# Altium PCB sd - net 1.5.pcbdoc
Units mil, origin at the board's own origin, x right, y up, seen from the top; angles counter-clockwise.
Board outline 6041.4 x 4421.1 mil, 4 copper layers (Top Layer, Inner1, Inner2, Bottom Layer), stack 62.5 mil thick; 11 components, 13 nets, 51 pads, 12 vias.
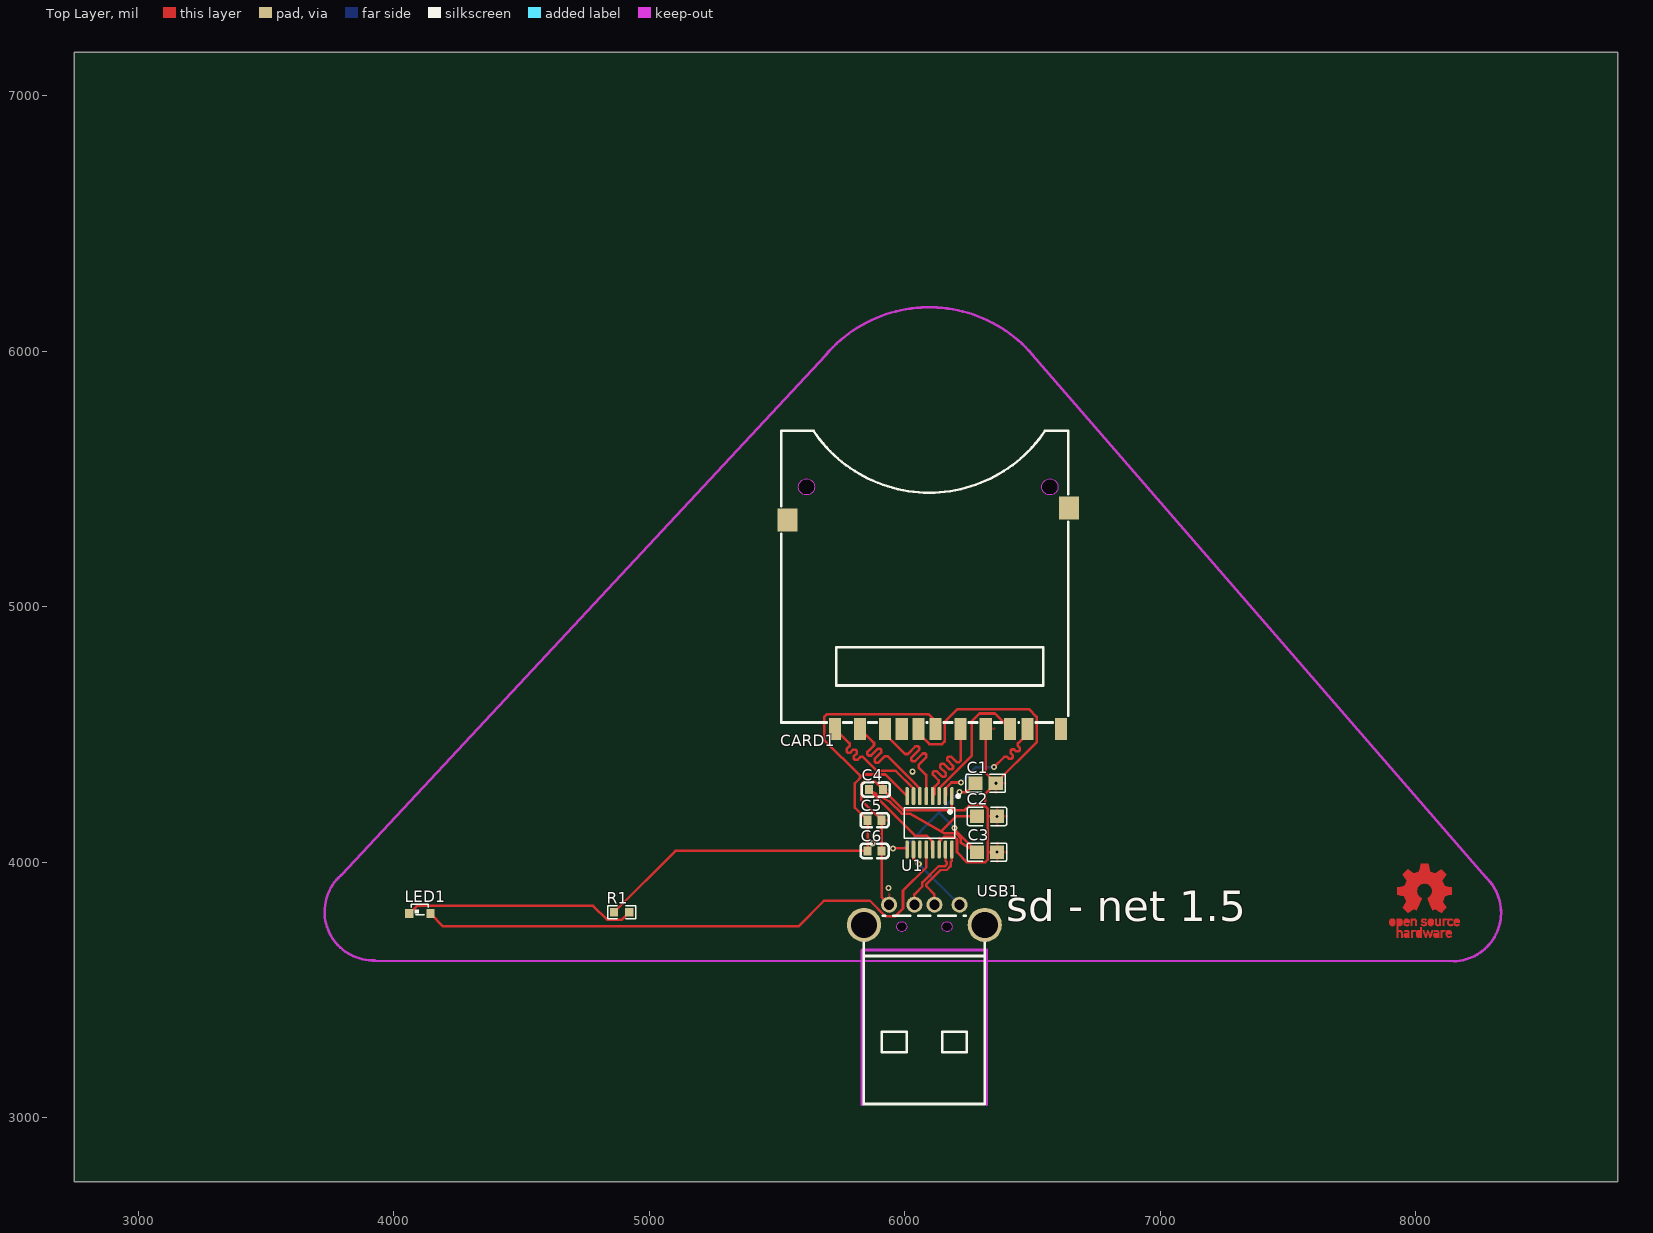
[diagram p0: Top Layer view]
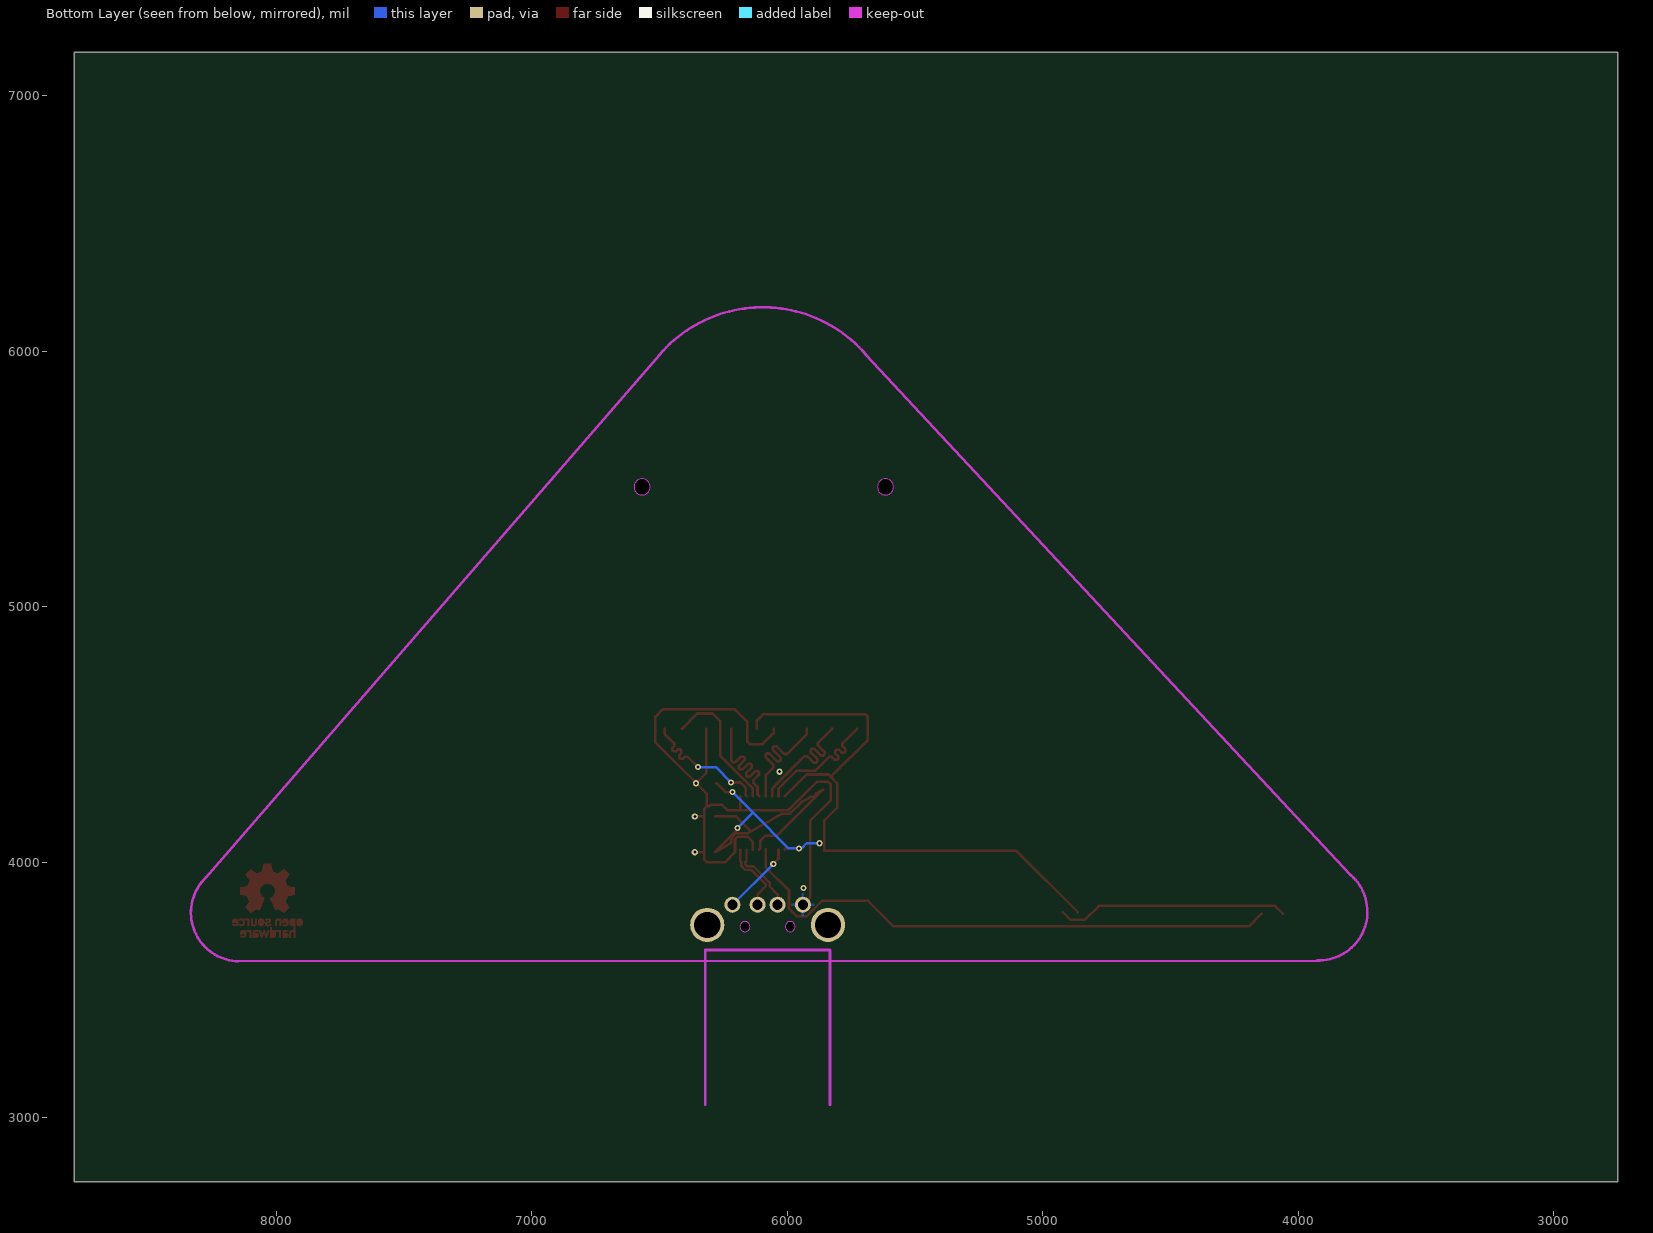
[diagram p1: Bottom Layer view, seen from below]
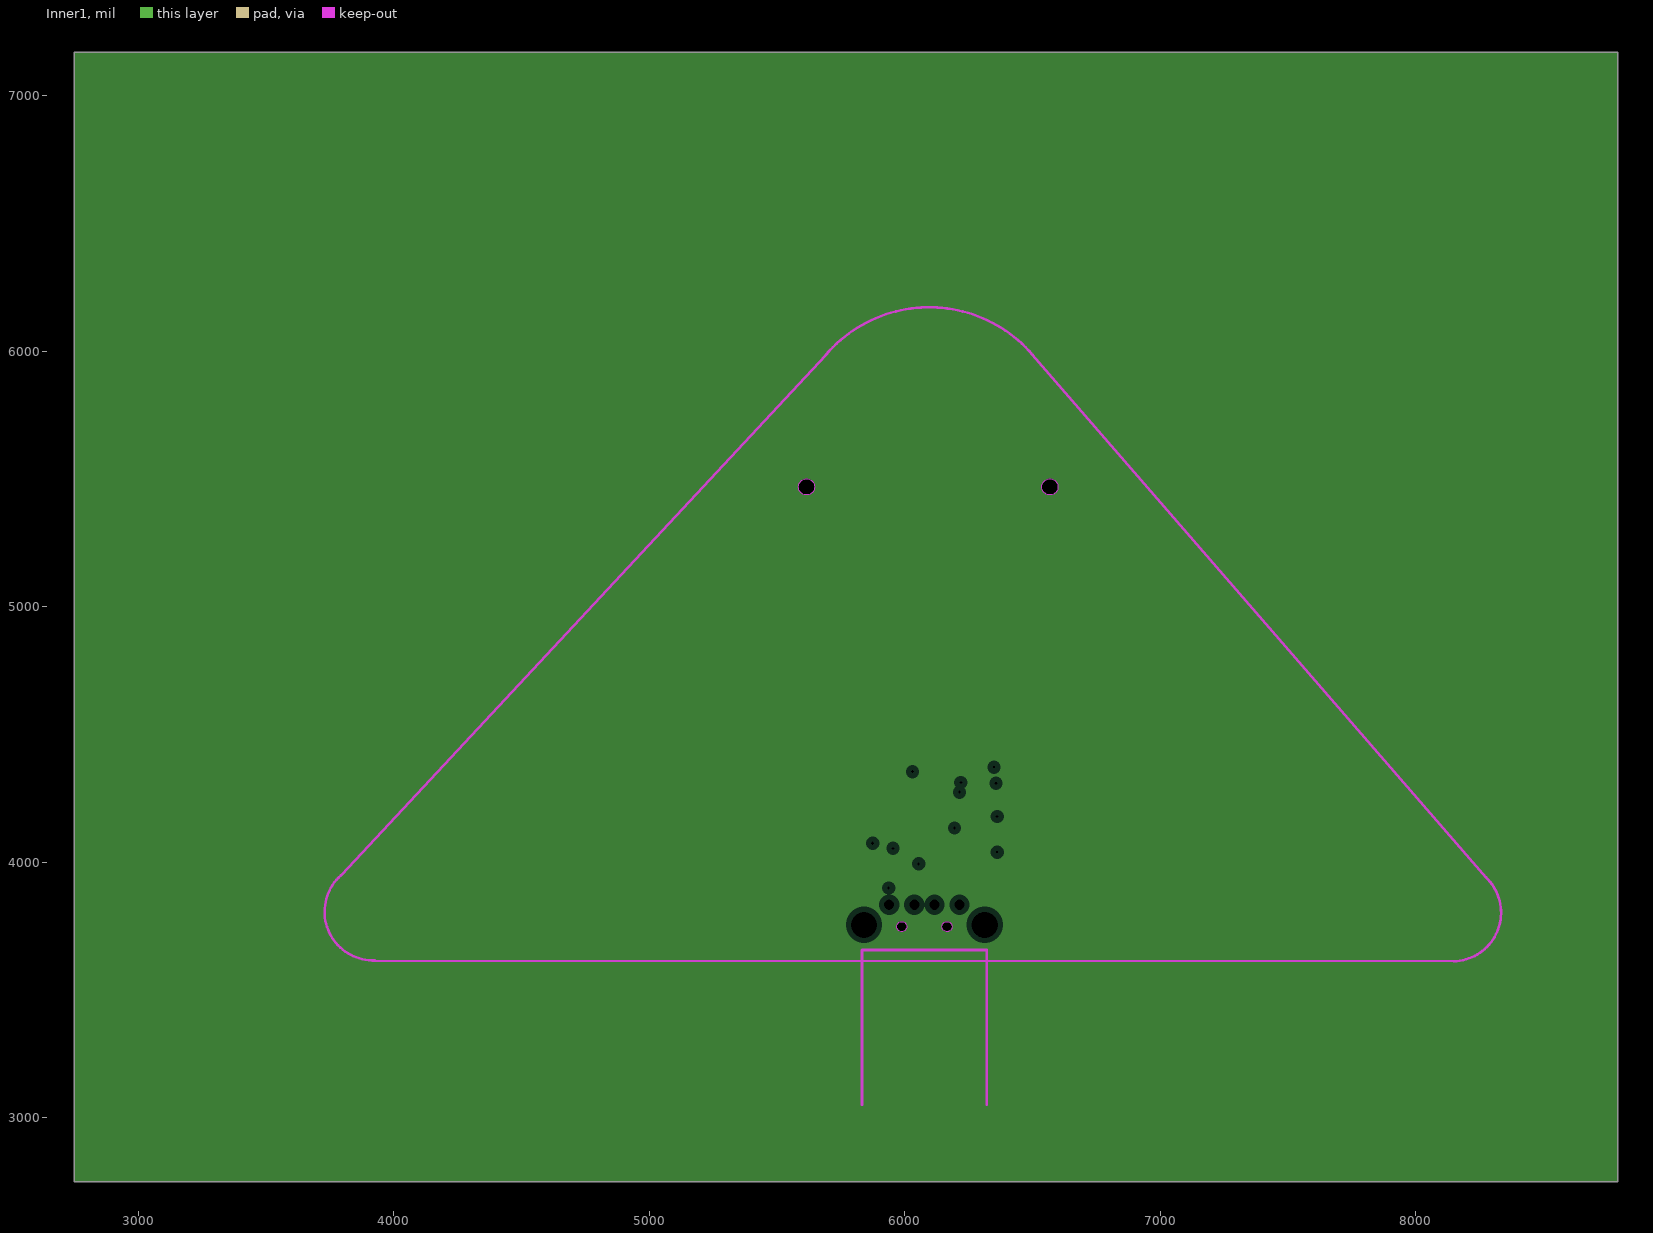
[diagram p2: Inner1, clearances drawn from the general rule]
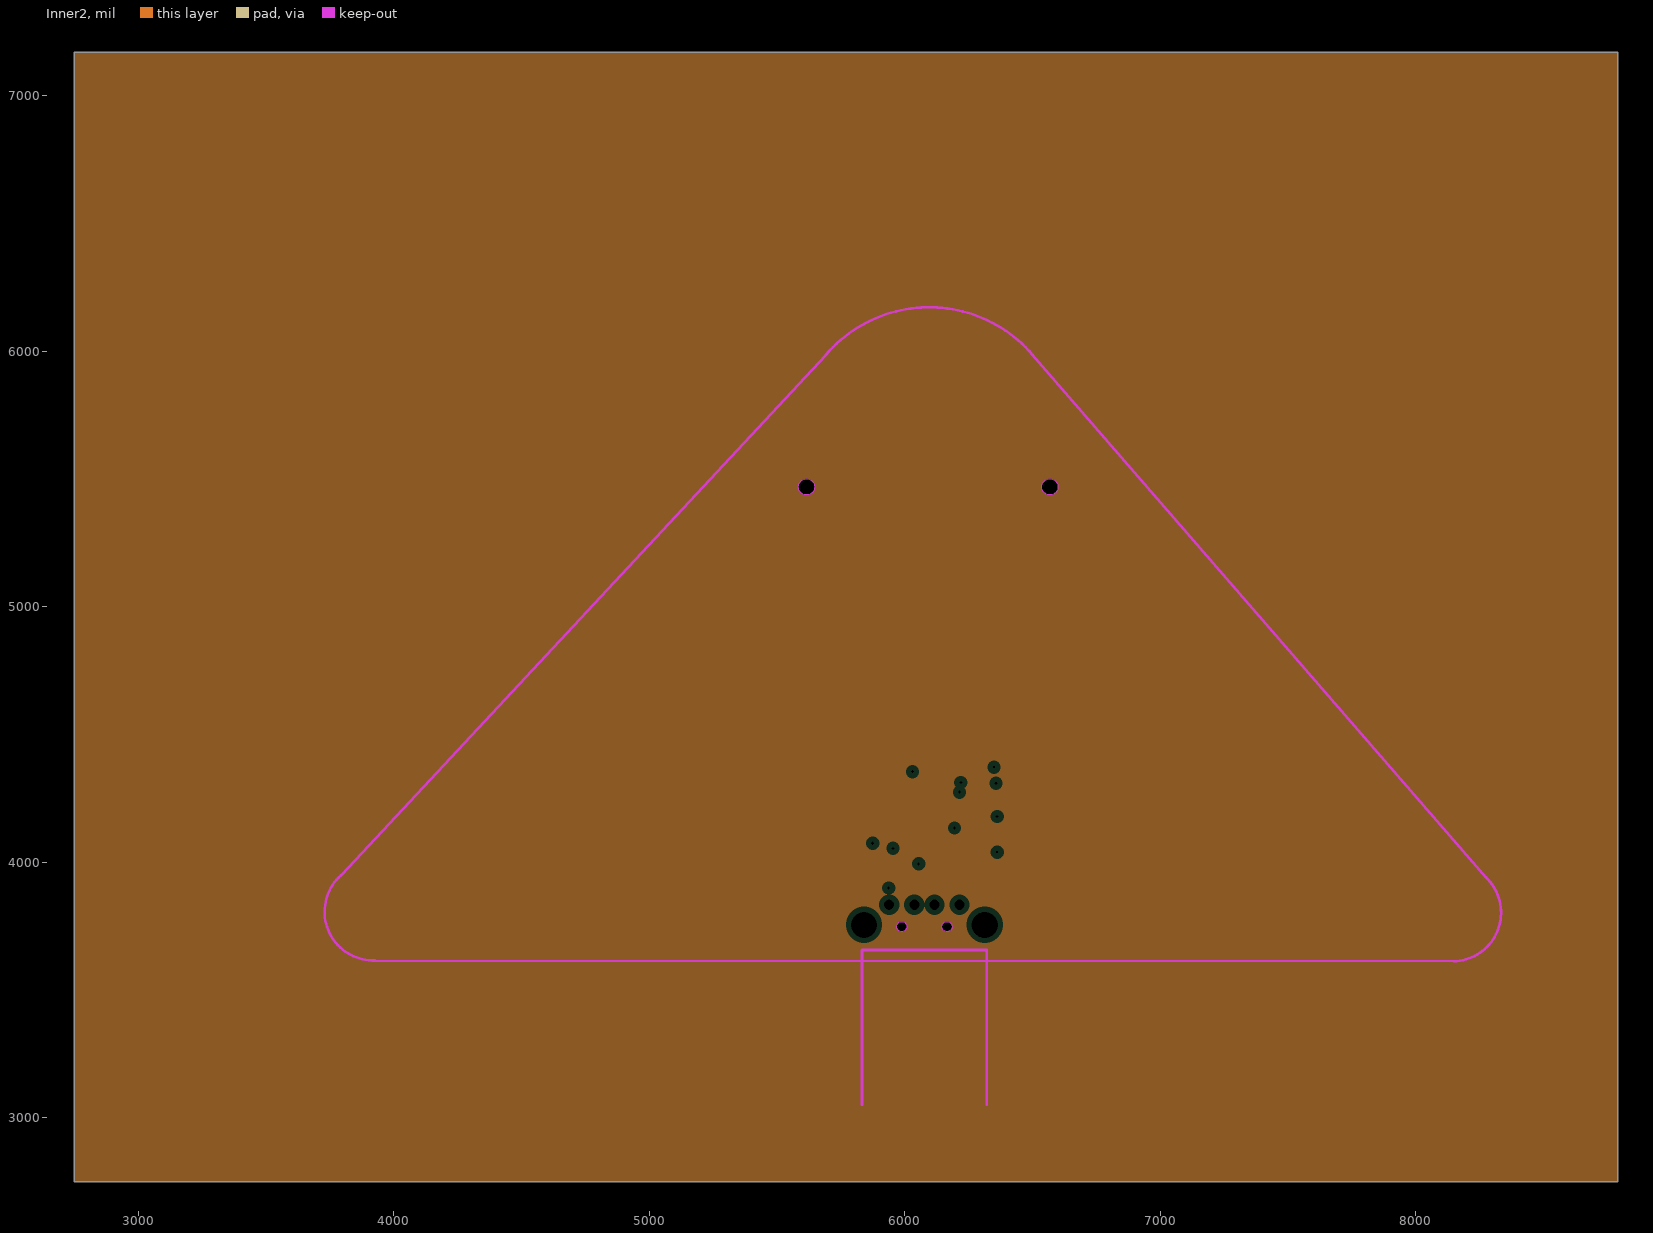
[diagram p3: Inner2, clearances drawn from the general rule]

## Layer stack, top to bottom
Top Layer: signal copper 1.4
Dielectric1: surface 8.3, 7628 RC49% 8.6mil, Dk 0
Inner1: plane copper 0.6
Dielectric2: surface 41.9, 1.1mm H/HOZ Copper, Dk 0
Inner2: plane copper 0.6
Dielectric3: surface 8.3, 7628 RC49% 8.6mil, Dk 0
Bottom Layer: signal copper 1.4

## Board outline
8791.4,2750 2750,2750 2750,7171.1 8791.4,7171.1

## Design rules (kind name [scope] priority, off if disabled: settings)
BoardOutlineClearance copperThickness1oz [All] p0: genericclearance=10 ignorepadtopadclearanceinfootprint=FALSE except(0: Arc-SplitContinuation Track-SplitContinuation SMDPad-SplitContinuation THPad-SplitContinuation Via-SplitContinuation Fill-SplitContinuation Poly-SplitContinuation Region-SplitContinuation Text-SplitContinuation)
BoardOutlineClearance copperThickness2oz [All] p0: genericclearance=10 ignorepadtopadclearanceinfootprint=FALSE except(0: Arc-SplitContinuation Track-SplitContinuation SMDPad-SplitContinuation THPad-SplitContinuation Via-SplitContinuation Fill-SplitContinuation Poly-SplitContinuation Region-SplitContinuation Text-SplitContinuation)
BoardOutlineClearance Plane_innerPlane [All] p0: genericclearance=10 ignorepadtopadclearanceinfootprint=FALSE except(0: Arc-SplitContinuation Track-SplitContinuation SMDPad-SplitContinuation THPad-SplitContinuation Via-SplitContinuation Fill-SplitContinuation Poly-SplitContinuation Region-SplitContinuation Text-SplitContinuation)
BoardOutlineClearance Copper_copperRegion [All] p0: genericclearance=10 ignorepadtopadclearanceinfootprint=FALSE except(0: Arc-SplitContinuation Track-SplitContinuation SMDPad-SplitContinuation THPad-SplitContinuation Via-SplitContinuation Fill-SplitContinuation Poly-SplitContinuation Region-SplitContinuation Text-SplitContinuation)
BoardOutlineClearance otherClearance [All] p0: genericclearance=10 ignorepadtopadclearanceinfootprint=FALSE except(0: Arc-SplitContinuation Track-SplitContinuation SMDPad-SplitContinuation THPad-SplitContinuation Via-SplitContinuation Fill-SplitContinuation Poly-SplitContinuation Region-SplitContinuation Text-SplitContinuation)
Clearance copperThickness1oz [All] p1: gap=7 ignorepadtopadclearanceinfootprint=FALSE
Clearance copperThickness2oz [All] p1: gap=7 ignorepadtopadclearanceinfootprint=FALSE
Clearance Plane_innerPlane [All] p1: gap=7 ignorepadtopadclearanceinfootprint=FALSE
Clearance Copper_copperRegion [All] p1: gap=7 ignorepadtopadclearanceinfootprint=FALSE
Clearance otherClearance [All] p1: gap=7 ignorepadtopadclearanceinfootprint=FALSE
DiffPairsRouting differentialPair [All] p1: maxuncoupledlength=10 minlimit=6 maxlimit=Infinity mostfreqgap=6 toplayer_minwidth=5 toplayer_prefwidth=10 toplayer_maxwidth=100 bottomlayer_minwidth=5 bottomlayer_prefwidth=10 bottomlayer_maxwidth=100
DiffPairsRouting USB_Pair [All] p1: maxuncoupledlength=4.7244 minlimit=5.9055 maxlimit=Infinity mostfreqgap=5.9055 toplayer_minwidth=9.4488 toplayer_prefwidth=9.4488 toplayer_maxwidth=11.811 bottomlayer_minwidth=9.4488 bottomlayer_prefwidth=9.4488 bottomlayer_maxwidth=11.811
PasteMaskExpansion pasteMaskExpansion [All] p1: expansion=0
PlaneConnect innerPlane [All] p1: planeconnectstyle=Relief reliefexpansion=20 reliefentries=4 reliefconductorwidth=10 reliefairgap=10
PolygonConnect copperRegion [All] p1: connectstyle=Relief reliefentries=4 reliefconductorwidth=10 polygonreliefangle="90 Angle" airgapwidth=10
RoutingVias viaSize [All] p1: viastyle="Through Hole" holewidth=12.0078 minholewidth=11.811 maxholewidth=248.0314 width=12.0078 minwidth=11.811 maxwidth=248.0314
SolderMaskExpansion solderMaskExpansion [IsVia] p1: useseparateexpansions=TRUE expansion=-1000 expansionbottom=-1000
SolderMaskExpansion solderMaskExpansion [All] p2: useseparateexpansions=TRUE expansion=2 expansionbottom=2
Width copperThickness1oz [All] p1: maxlimit=100 minlimit=5 preferedwidth=10
Width copperThickness2oz [All] p1: maxlimit=100 minlimit=8 preferedwidth=10

## Components (designator, comment, footprint, x,y, rotation, side; value= is the part's Value field where it differs from the comment)
C1 "10uF" C0805 6317.5,4310 r0 top
C2 "10uF" C0805 6322.5,4180 r0 top
C3 "10uF" C0805 6322.5,4040 r0 top
C4 "100nF" C0603 5887.5,4285 r0 top
C5 "100nF" C0603 5882.5,4165 r0 top
C6 "100nF" C0603 5882.5,4045 r0 top
CARD1 "SD-006M" SD-SMD_SD-006M 6092.5,4955 r180 top
LED1 "12-215SYGC/S530-E2/TR8" LED-SMD_12-215SYGC-S530-E2-TR8 4102.5,3800 r0 top
R1 "220Ω" R0603 4892.5,3805 r0 top
U1 "GL823K-HCY04" SSOP-16_L4.9-W3.9-P0.64-LS6.0-BL 6097.5,4155 r180 top locked
USB1 "AM90" USB-AM-TH_AM90 6077.5,3795 r0 top locked

## Footprints (in the part's own frame and the unit in brackets; to place one, negate y for a bottom-side part, rotate by r counter-clockwise, add the part's x,y. Pads: shape width x height; smd on the part's side, far side on the other; paste and mask are expansions set on the pad)
C0603 [mil]
  rect 31.5x35.4 smd: 1(-27.5,0) 2(27.6,0)
  silkscreen extent -55,-28 55,28
C0805 [mil]
  rect 55.5x53.1 smd paste-3937 mask+2: 1(-39.3,0) 2(39.4,0)
  silkscreen extent -77,-36 77,36
LED-SMD_12-215SYGC-S530-E2-TR8 [mil]
  rect 31.5x35.4 smd: 1(41.4,-0.1) 2(-41.3,0.1)
  silkscreen extent -33,-4 34,35
R0603 [mil]
  rect 31.8x34 smd paste-3937 mask+2: 1(-29.6,0) 2(29.7,0)
  silkscreen extent -54,-26 55,26
SD-SMD_SD-006M [mil]
  rect 47.2x86.6 smd: 1(266.9,432.1) 2(168.5,432.1) 3(38.6,432.1) 4(-28.4,432.1) 5(-126.8,432.1) 6(-225.2,432.1) 7(-320.9,432.1) 8(-387.8,432.1) 9(365.3,432.1) CD(103.5,432.1) WP(-519.7,432.1)
  rect 78.7x90.6 smd: 12(551.1,-384.8) 13(-551.2,-432.1)
  Board Outline Layer lines w0.1: 507.8,-514.8 507.5,-519.7 506.3,-524.5 504.4,-529.1 501.8,-533.3 498.6,-537.1 494.9,-540.3 490.6,-542.9 486.1,-544.7 481.3,-545.9 476.3,-546.3 471.4,-545.9 466.6,-544.7 462,-542.9 457.8,-540.3 454.1,-537.1 450.9,-533.3 448.3,-529.1 446.4,-524.5 445.2,-519.7 444.8,-514.8 445.2,-509.9 446.4,-505.1 448.3,-500.5 450.9,-496.3 454.1,-492.5 457.8,-489.3 462,-486.7 466.6,-484.8 471.4,-483.7 476.3,-483.3 481.3,-483.7 486.1,-484.8 490.6,-486.7 494.9,-489.3 498.6,-492.5 501.8,-496.3 504.4,-500.5 506.3,-505.1 507.5,-509.9 507.8,-514.8 ; -444.9,-514.8 -445.3,-519.7 -446.5,-524.5 -448.4,-529.1 -450.9,-533.3 -454.1,-537.1 -457.9,-540.3 -462.1,-542.9 -466.7,-544.7 -471.5,-545.9 -476.4,-546.3 -481.3,-545.9 -486.1,-544.7 -490.7,-542.9 -494.9,-540.3 -498.7,-537.1 -501.9,-533.3 -504.5,-529.1 -506.4,-524.5 -507.5,-519.7 -507.9,-514.8 -507.5,-509.9 -506.4,-505.1 -504.5,-500.5 -501.9,-496.3 -498.7,-492.5 -494.9,-489.3 -490.7,-486.7 -486.1,-484.8 -481.3,-483.7 -476.4,-483.3 -471.5,-483.7 -466.7,-484.8 -462.1,-486.7 -457.9,-489.3 -454.1,-492.5 -450.9,-496.3 -448.4,-500.5 -446.5,-505.1 -445.3,-509.9 -444.9,-514.8
  Board Outline Layer region: 507.8,-514.8 507.5,-519.7 506.3,-524.5 504.4,-529.1 501.8,-533.3 498.6,-537.1 494.9,-540.3 490.6,-542.9 486.1,-544.7 481.3,-545.9 476.3,-546.3 471.4,-545.9 466.6,-544.7 462,-542.9 457.8,-540.3 454.1,-537.1 450.9,-533.3 448.3,-529.1 446.4,-524.5 445.2,-519.7 444.8,-514.8 445.2,-509.9 446.4,-505.1 448.3,-500.5 450.9,-496.3 454.1,-492.5 457.8,-489.3 462,-486.7 466.6,-484.8 471.4,-483.7 476.3,-483.3 481.3,-483.7 486.1,-484.8 490.6,-486.7 494.9,-489.3 498.6,-492.5 501.8,-496.3 504.4,-500.5 506.3,-505.1 507.5,-509.9
  Board Outline Layer region: 507.8,-514.8 507.5,-519.7 506.3,-524.5 504.4,-529.1 501.8,-533.3 498.6,-537.1 494.9,-540.3 490.6,-542.9 486.1,-544.7 481.3,-545.9 476.3,-546.3 471.4,-545.9 466.6,-544.7 462,-542.9 457.8,-540.3 454.1,-537.1 450.9,-533.3 448.3,-529.1 446.4,-524.5 445.2,-519.7 444.8,-514.8 445.2,-509.9 446.4,-505.1 448.3,-500.5 450.9,-496.3 454.1,-492.5 457.8,-489.3 462,-486.7 466.6,-484.8 471.4,-483.7 476.3,-483.3 481.3,-483.7 486.1,-484.8 490.6,-486.7 494.9,-489.3 498.6,-492.5 501.8,-496.3 504.4,-500.5 506.3,-505.1 507.5,-509.9
  Board Outline Layer region: -444.9,-514.8 -445.3,-519.7 -446.5,-524.5 -448.4,-529.1 -450.9,-533.3 -454.1,-537.1 -457.9,-540.3 -462.1,-542.9 -466.7,-544.7 -471.5,-545.9 -476.4,-546.3 -481.3,-545.9 -486.1,-544.7 -490.7,-542.9 -494.9,-540.3 -498.7,-537.1 -501.9,-533.3 -504.5,-529.1 -506.4,-524.5 -507.5,-519.7 -507.9,-514.8 -507.5,-509.9 -506.4,-505.1 -504.5,-500.5 -501.9,-496.3 -498.7,-492.5 -494.9,-489.3 -490.7,-486.7 -486.1,-484.8 -481.3,-483.7 -476.4,-483.3 -471.5,-483.7 -466.7,-484.8 -462.1,-486.7 -457.9,-489.3 -454.1,-492.5 -450.9,-496.3 -448.4,-500.5 -446.5,-505.1 -445.3,-509.9
  Board Outline Layer region: -444.9,-514.8 -445.3,-519.7 -446.5,-524.5 -448.4,-529.1 -450.9,-533.3 -454.1,-537.1 -457.9,-540.3 -462.1,-542.9 -466.7,-544.7 -471.5,-545.9 -476.4,-546.3 -481.3,-545.9 -486.1,-544.7 -490.7,-542.9 -494.9,-540.3 -498.7,-537.1 -501.9,-533.3 -504.5,-529.1 -506.4,-524.5 -507.5,-519.7 -507.9,-514.8 -507.5,-509.9 -506.4,-505.1 -504.5,-500.5 -501.9,-496.3 -498.7,-492.5 -494.9,-489.3 -490.7,-486.7 -486.1,-484.8 -481.3,-483.7 -476.4,-483.3 -471.5,-483.7 -466.7,-484.8 -462.1,-486.7 -457.9,-489.3 -454.1,-492.5 -450.9,-496.3 -448.4,-500.5 -446.5,-505.1 -445.3,-509.9
  Multi-Layer board cut-out: 507.8,-514.8 507.5,-519.7 506.3,-524.5 504.4,-529.1 501.8,-533.3 498.6,-537.1 494.9,-540.3 490.6,-542.9 486.1,-544.7 481.3,-545.9 476.3,-546.3 471.4,-545.9 466.6,-544.7 462,-542.9 457.8,-540.3 454.1,-537.1 450.9,-533.3 448.3,-529.1 446.4,-524.5 445.2,-519.7 444.8,-514.8 445.2,-509.9 446.4,-505.1 448.3,-500.5 450.9,-496.3 454.1,-492.5 457.8,-489.3 462,-486.7 466.6,-484.8 471.4,-483.7 476.3,-483.3 481.3,-483.7 486.1,-484.8 490.6,-486.7 494.9,-489.3 498.6,-492.5 501.8,-496.3 504.4,-500.5 506.3,-505.1 507.5,-509.9
  Multi-Layer board cut-out: -444.9,-514.8 -445.3,-519.7 -446.5,-524.5 -448.4,-529.1 -450.9,-533.3 -454.1,-537.1 -457.9,-540.3 -462.1,-542.9 -466.7,-544.7 -471.5,-545.9 -476.4,-546.3 -481.3,-545.9 -486.1,-544.7 -490.7,-542.9 -494.9,-540.3 -498.7,-537.1 -501.9,-533.3 -504.5,-529.1 -506.4,-524.5 -507.5,-519.7 -507.9,-514.8 -507.5,-509.9 -506.4,-505.1 -504.5,-500.5 -501.9,-496.3 -498.7,-492.5 -494.9,-489.3 -490.7,-486.7 -486.1,-484.8 -481.3,-483.7 -476.4,-483.3 -471.5,-483.7 -466.7,-484.8 -462.1,-486.7 -457.9,-489.3 -454.1,-492.5 -450.9,-496.3 -448.4,-500.5 -446.5,-505.1 -445.3,-509.9
  silkscreen extent -547,-734 575,408
SSOP-16_L4.9-W3.9-P0.64-LS6.0-BL [mil]
  oval 14x71.4 smd: 1(-87.5,-104.5) 2(-62.5,-104.5) 3(-37.5,-104.5) 4(-12.5,-104.5) 5(12.5,-104.5) 6(37.5,-104.5) 7(62.5,-104.5) 8(87.5,-104.5) 9(87.5,104.5) 10(62.5,104.5) 11(37.5,104.5) 12(12.5,104.5) 13(-12.5,104.5) 14(-37.5,104.5) 15(-62.5,104.5) 16(-87.5,104.5)
  silkscreen extent -118,-110 100,60
USB-AM-TH_AM90 [mil]
  round 63 hole 39.4: 1(137.8,39.4) 2(39.4,39.4) 3(-39.3,39.4) 4(-137.8,39.4)
  round 133.9 hole 102.4: MH1(236.3,-39.4) MH2(-236.2,-39.4)
  Board Outline Layer lines w0.1: -108.2,-46.3 -107.9,-50.1 -106.7,-53.8 -104.9,-57.2 -102.5,-60.2 -99.5,-62.6 -96.1,-64.4 -92.4,-65.6 -88.6,-65.9 -84.7,-65.6 -81,-64.4 -77.6,-62.6 -74.6,-60.2 -72.2,-57.2 -70.4,-53.8 -69.2,-50.1 -68.9,-46.3 -69.2,-42.4 -70.4,-38.7 -72.2,-35.3 -74.6,-32.3 -77.6,-29.9 -81,-28.1 -84.7,-27 -88.6,-26.6 -92.4,-27 -96.1,-28.1 -99.5,-29.9 -102.5,-32.3 -104.9,-35.3 -106.7,-38.7 -107.9,-42.4 -108.2,-46.3 ; 68.9,-46.3 69.3,-50.1 70.4,-53.8 72.2,-57.2 74.7,-60.2 77.7,-62.6 81.1,-64.4 84.8,-65.6 88.6,-65.9 92.5,-65.6 96.2,-64.4 99.6,-62.6 102.5,-60.2 105,-57.2 106.8,-53.8 107.9,-50.1 108.3,-46.3 107.9,-42.4 106.8,-38.7 105,-35.3 102.5,-32.3 99.6,-29.9 96.2,-28.1 92.5,-27 88.6,-26.6 84.8,-27 81.1,-28.1 77.7,-29.9 74.7,-32.3 72.2,-35.3 70.4,-38.7 69.3,-42.4 68.9,-46.3
  Board Outline Layer lines w10: -244.1,-744.1 -244.1,-137.8 244.1,-137.8 244.1,-744.1
  Board Outline Layer region: 108.3,-46.3 107.9,-50.1 106.8,-53.8 105,-57.2 102.5,-60.2 99.6,-62.6 96.2,-64.4 92.5,-65.6 88.6,-65.9 84.8,-65.6 81.1,-64.4 77.7,-62.6 74.7,-60.2 72.2,-57.2 70.4,-53.8 69.3,-50.1 68.9,-46.3 69.3,-42.4 70.4,-38.7 72.2,-35.3 74.7,-32.3 77.7,-29.9 81.1,-28.1 84.8,-27 88.6,-26.6 92.5,-27 96.2,-28.1 99.6,-29.9 102.5,-32.3 105,-35.3 106.8,-38.7 107.9,-42.4
  Board Outline Layer region: 108.3,-46.3 107.9,-50.1 106.8,-53.8 105,-57.2 102.5,-60.2 99.6,-62.6 96.2,-64.4 92.5,-65.6 88.6,-65.9 84.8,-65.6 81.1,-64.4 77.7,-62.6 74.7,-60.2 72.2,-57.2 70.4,-53.8 69.3,-50.1 68.9,-46.3 69.3,-42.4 70.4,-38.7 72.2,-35.3 74.7,-32.3 77.7,-29.9 81.1,-28.1 84.8,-27 88.6,-26.6 92.5,-27 96.2,-28.1 99.6,-29.9 102.5,-32.3 105,-35.3 106.8,-38.7 107.9,-42.4
  Board Outline Layer region: -68.9,-46.3 -69.2,-50.1 -70.4,-53.8 -72.2,-57.2 -74.6,-60.2 -77.6,-62.6 -81,-64.4 -84.7,-65.6 -88.6,-65.9 -92.4,-65.6 -96.1,-64.4 -99.5,-62.6 -102.5,-60.2 -104.9,-57.2 -106.7,-53.8 -107.9,-50.1 -108.2,-46.3 -107.9,-42.4 -106.7,-38.7 -104.9,-35.3 -102.5,-32.3 -99.5,-29.9 -96.1,-28.1 -92.4,-27 -88.6,-26.6 -84.7,-27 -81,-28.1 -77.6,-29.9 -74.6,-32.3 -72.2,-35.3 -70.4,-38.7 -69.2,-42.4
  Board Outline Layer region: -68.9,-46.3 -69.2,-50.1 -70.4,-53.8 -72.2,-57.2 -74.6,-60.2 -77.6,-62.6 -81,-64.4 -84.7,-65.6 -88.6,-65.9 -92.4,-65.6 -96.1,-64.4 -99.5,-62.6 -102.5,-60.2 -104.9,-57.2 -106.7,-53.8 -107.9,-50.1 -108.2,-46.3 -107.9,-42.4 -106.7,-38.7 -104.9,-35.3 -102.5,-32.3 -99.5,-29.9 -96.1,-28.1 -92.4,-27 -88.6,-26.6 -84.7,-27 -81,-28.1 -77.6,-29.9 -74.6,-32.3 -72.2,-35.3 -70.4,-38.7 -69.2,-42.4
  Multi-Layer board cut-out: 108.3,-46.3 107.9,-50.1 106.8,-53.8 105,-57.2 102.5,-60.2 99.6,-62.6 96.2,-64.4 92.5,-65.6 88.6,-65.9 84.8,-65.6 81.1,-64.4 77.7,-62.6 74.7,-60.2 72.2,-57.2 70.4,-53.8 69.3,-50.1 68.9,-46.3 69.3,-42.4 70.4,-38.7 72.2,-35.3 74.7,-32.3 77.7,-29.9 81.1,-28.1 84.8,-27 88.6,-26.6 92.5,-27 96.2,-28.1 99.6,-29.9 102.5,-32.3 105,-35.3 106.8,-38.7 107.9,-42.4
  Multi-Layer board cut-out: -68.9,-46.3 -69.2,-50.1 -70.4,-53.8 -72.2,-57.2 -74.6,-60.2 -77.6,-62.6 -81,-64.4 -84.7,-65.6 -88.6,-65.9 -92.4,-65.6 -96.1,-64.4 -99.5,-62.6 -102.5,-60.2 -104.9,-57.2 -106.7,-53.8 -107.9,-50.1 -108.2,-46.3 -107.9,-42.4 -106.7,-38.7 -104.9,-35.3 -102.5,-32.3 -99.5,-29.9 -96.1,-28.1 -92.4,-27 -88.6,-26.6 -84.7,-27 -81,-28.1 -77.6,-29.9 -74.6,-32.3 -72.2,-35.3 -70.4,-38.7 -69.2,-42.4
  silkscreen extent -236,-741 236,-4

## Via types
v1: diameter 24, hole 12, Top Layer to Bottom Layer, 12 vias

## Nets (pads, with @x,y where several pads share a name; then routed paths per layer and width w, separated by ;. In a path a pad name is that pad's centre, name@x,y a point inside that pad or via, vN(x,y) a via of type N, cw(c..) or ccw(c..) an arc to the next point about the centre after c; other vN are vias at no path point)
$1N2347: U1.10 USB1.1 | length 290.8
  Top Layer w10: U1.10 6035,4014.7 v1(6055.3,3994.4)
  Bottom Layer w10: v1(6055.3,3994.4) USB1.1
$1N2351: C1.1 C2.1 C3.1 C4.1 C5.1 C6.1 CARD1.4 R1.1 U1.8 U1.9 U1.13 | length 4267.7
  Top Layer w10: R1.1 5102.9,4045 C6.1 5855,4075 ; v1(5875,4075) 5855,4075 ; 5888.3,4267.3 ccw(c5899.3,4267.3) 5899.3,4256.3 5909.6,4256.3 5943.8,4236.5 5989.3,4191 6022.4,4191 6142.2,4121.6 ; 5888.4,4267.3 5888.4,4268.6 C4.1 6040,4105 6085.5,4105 6105.5,4085 6105.5,4055 U1.13 ; v1(5955,4055) 6005.5,4055 U1.9 ; U1.8 5925.4,4344.2 5839.6,4344.2 5835,4339.5 ; CARD1.4 6120.9,4553.6 6095,4579.5 5695,4579.5 5685,4569.5 5685,4479.5 5825,4339.5 5835,4339.5 ; v1(6195,4135) 6195,4128.2 C3.1 6219.1,4077.1 6219.1,4096.3 6200.9,4114.6 6154.4,4114.6 6142.2,4121.6 ; v1(6215,4275) 6243.2,4275 C1.1 ; C2.1 6200.5,4180 6142.2,4121.6 ; 5835,4339.5 5805,4309.5 5805,4215 C5.1 5855,4075
  Bottom Layer w10: v1(5875,4075) 5925,4075 5945,4055 v1(5955,4055) 5995,4055 6135,4195 ; v1(6195,4135) 6135,4195 ; v1(6215,4275) 6135,4195
$1N2352: LED1.2 R1.2 | length 908.7
  Top Layer w10: LED1.2 4091.2,3830.1 4781.2,3830.1 4836.3,3775 4892.2,3775 R1.2
$1N2353: LED1.1 U1.12 | length 2217.7
  Top Layer w10: LED1.1 4193.9,3749.9 5583.9,3749.9 5683.9,3849.9 5863.9,3849.9 5923.9,3789.9 5963.9,3789.9 5993.9,3819.9 5993.9,3889.9 6085,3981.1 U1.12
$1N2355: CARD1.2 U1.5 | length 524.9
  Top Layer w10: CARD1.2 5924,4502.9 6002.5,4424.4 6012.5,4424.4 6042.8,4454.7 6052.8,4454.7 6056.9,4450.6 6056.9,4440.6 6026.6,4410.3 6026.6,4400.3 6030.8,4396.1 6040.8,4396.1 6071.1,4426.4 6081.1,4426.4 6085.2,4422.3 6085.2,4412.3 6054.9,4382 6054.9,4372 6084,4342.9 6084,4260.5 U1.5
$1N2356: CARD1.1 U1.6 | length 528.1
  Top Layer w10: CARD1.1 5880.2,4468.3 5880.2,4458.3 5854.7,4432.8 5854.7,4422.8 5858.9,4418.6 5868.9,4418.6 5894.4,4444.1 5904.4,4444.1 5908.5,4440 5908.5,4430 5883,4404.5 5883,4394.5 5887.2,4390.4 5897.2,4390.4 5922.6,4415.8 5932.6,4415.8 6042.2,4306.2 6042.5,4306.2 6053,4295.7 6053,4295.5 6060,4288.4 U1.6
$1N2358: CARD1.5 U1.4 | length 529.7
  Top Layer w10: U1.4 6117.1,4266.5 6117.1,4295.7 6133,4311.7 6133,4321.7 6111.1,4343.6 6111.1,4353.6 6115.3,4357.7 6125.3,4357.7 6147.2,4335.8 6157.2,4335.8 6161.3,4339.9 6161.3,4349.9 6139.4,4371.9 6139.4,4381.9 6143.5,4386 6153.5,4386 6175.4,4364.1 6185.4,4364.1 6189.6,4368.2 6189.6,4378.2 6167.7,4400.1 6167.7,4410.1 6171.8,4414.3 6181.8,4414.3 6203.7,4392.4 6213.7,4392.4 6219.3,4397.9 CARD1.5
$1N2360: CARD1.7 U1.3 | length 533.9
  Top Layer w10: U1.3 6135,4289.5 6263.4,4417.8 6263.4,4552.9 6293.4,4582.9 6353.4,4582.9 CARD1.7
$1N2361: CARD1.8 U1.2 | length 525.1
  Top Layer w10: U1.2 6163.4,4262.9 6163.4,4292.9 6183.4,4312.9 v1(6220.3,4312.9) ; v1(6350.3,4372.9) 6391,4413.6 6401,4413.6 6408.5,4406 6418.5,4406 6422.7,4410.1 6422.7,4420.1 6415.1,4427.7 6415.1,4437.7 6419.3,4441.9 6429.3,4441.9 6436.8,4434.3 6446.8,4434.3 6451,4438.4 6451,4448.4 6443.4,4456 6443.4,4466 6480.3,4502.9 CARD1.8
  Bottom Layer w10: v1(6220.3,4312.9) 6280.3,4372.9 v1(6350.3,4372.9)
$1N2362: CARD1.9 U1.7 | length 521.3
  Top Layer w10: CARD1.9 5784.6,4465.5 5784.6,4455.5 5773.3,4444.2 5773.3,4434.2 5777.5,4430.1 5787.5,4430.1 5798.8,4441.4 5808.8,4441.4 5812.9,4437.2 5812.9,4427.2 5801.6,4415.9 5801.6,4405.9 5805.7,4401.8 5815.7,4401.8 5827,4413.1 5837,4413.1 5892,4358.2 5965.5,4358.2 6035,4288.7 U1.7
$1N3940: U1.15 USB1.3 | length 285.1
  Top Layer w9.4: USB1.3 6038.2,3874.8 6069.9,3906.5 6069.9,3921.8 6133.8,3985.8 6158.5,3985.8 6164.9,3992.1 6164.9,4001 6160,4005.8 U1.15
$1N3946: U1.16 USB1.2 | length 285
  Top Layer w9.4: USB1.2 6116.9,3874.8 6085.2,3906.5 6085.2,3915.4 6140.2,3970.4 6164.9,3970.4 6180.2,3985.7 6180.2,4001 6185,4005.8 U1.16
GND: C1.2 C2.2 C3.2 C4.2 C5.2 C6.2 CARD1.3 CARD1.6 U1.1 U1.14 USB1.4 | length 2981.7
  Top Layer w10: USB1.4 5910.1,3864 C6.2 C5.2 5830.1,4245 5830.1,4305 5840.1,4315 5885.1,4315 C4.2 5995.1,4205 6185.1,4205 ; CARD1.3 6053.9,4505.9 6096.9,4462.9 6146.9,4462.9 6156.9,4472.9 6156.9,4550 6206.9,4600 6486.9,4600 6516.9,4570 6516.9,4470 C1.2 ; U1.14 6135.1,4080.5 6155.1,4100.5 6195.1,4100.5 6205.1,4090.5 6205.1,4040.5 6245.1,4000.5 6315.1,4000.5 6325.1,4010.5 6325.1,4040.5 ; U1.1@6185.1,4259.5 6185.1,4205 ; CARD1.6 6317.7,4349.2 C1.2 ; C2.2@6362.1,4180.5 6325.1,4180.5 ; v1(6362.5,4040) 6325.6,4040 6325.1,4040.5 ; 6185.1,4205 6235.1,4205 6255.1,4225 6300.6,4225 6305.1,4220.5 6315.1,4220.5 ; 6315.1,4220.5 6325.1,4210.5 6325.1,4180.5 ; 6315.1,4220.5 6315.1,4268.2 C1.2 ; 6325.1,4040.5 6325.1,4180.5
  other v1: 5937.5,3900 6362.5,4180 6357.5,4310 6031,4355.1
pads on no net: CARD1.12 CARD1.13 CARD1.CD CARD1.WP U1.11 USB1.MH1 USB1.MH2

## Polygon pours and split planes (outlines as drawn)
GND on Top Layer (solid, remove dead copper, pour order 0): 3662.5,6255 3662.5,3015 8377.5,3015 8377.5,6255
GND on Bottom Layer (solid, remove dead copper, pour order 2): 3672.5,6240 3672.5,3000 8382.5,3000 8382.5,6240

## Keep-outs
Board Outline Layer:
  lines w10: 3793.4,3949.4 3784.5,3940.9 3776.2,3931.9 3768.5,3922.3 3761.4,3912.3 3755,3901.9 3749.3,3891.1 3744.3,3879.9 3740,3868.4 3736.4,3856.7 3733.6,3844.7 3731.6,3832.6 3730.3,3820.5 3729.9,3808.2 3730.2,3796 3731.3,3783.7 3733.2,3771.6 3735.9,3759.7 3739.3,3747.9 3743.5,3736.4 3748.4,3725.2 3754.1,3714.3 3760.4,3703.8 3767.3,3693.7 3774.9,3684.1 3783.2,3675 3791.9,3666.4 3801.2,3658.4 3811,3651.1 3821.3,3644.3 3832,3638.3 3843,3633 3854.3,3628.3 3866,3624.4 3877.8,3621.3 3889.8,3618.9 3902,3617.3 3914.2,3616.5 3926.5,3616.5 ; 3796.5,3951.5 5691.5,5986.5 5705.1,6001.8 5719.2,6016.5 5734,6030.7 5749.2,6044.3 5765,6057.3 5781.2,6069.7 5797.9,6081.5 5815.1,6092.6 5832.7,6103 5850.6,6112.8 5868.9,6121.9 5887.6,6130.3 5906.5,6137.9 5925.8,6144.8 5945.3,6151 5965,6156.4 5984.9,6161.1 6004.9,6165 6025.1,6168.1 6045.5,6170.4 6065.8,6172 6086.3,6172.8 6106.7,6172.8 6127.1,6172 6147.5,6170.4 6167.8,6168.1 6188,6165 6208.1,6161.1 6228,6156.4 6247.7,6151 6267.2,6144.8 6286.4,6137.9 6305.4,6130.3 6324,6121.9 6342.3,6112.8 6360.3,6103 6377.9,6092.6 6395,6081.5 6411.7,6069.7 6428,6057.3 6443.7,6044.3 6459,6030.7 6473.7,6016.5 6487.9,6001.8 6501.5,5986.5 8275.9,3941.4 8284.3,3932.7 8292.2,3923.6 8299.5,3913.9 8306.2,3903.8 8312.3,3893.3 8317.6,3882.5 8322.3,3871.3 8326.2,3859.9 8329.4,3848.2 8331.9,3836.3 8333.6,3824.3 8334.5,3812.3 8334.7,3800.2 8334.1,3788.1 8332.7,3776.1 8330.6,3764.1 8327.7,3752.4 8324.1,3740.8 8319.8,3729.5 8314.7,3718.5 8309,3707.9 8302.6,3697.6 8295.5,3687.7 8287.9,3678.4 8279.7,3669.5 8270.9,3661.1 8261.6,3653.4 8251.9,3646.2 8241.7,3639.7 8231.1,3633.8 8220.1,3628.6 8208.9,3624.2 8197.4,3620.4 8185.7,3617.4 8173.8,3615.1 8161.8,3613.6 8149.7,3612.8 ; 3915.7,3615.9 8155.7,3612.9

## Other copper
Top Layer:
  region: 8134.3,3705.9 8132.8,3705.6 8130.3,3705.7 8127.9,3705.8 8126.9,3706 8125.9,3706.3 8124.6,3706.9 8123.2,3707.6 8121.9,3708.9 8120.6,3710.2 8119.9,3711.5 8119.3,3712.8 8118.9,3714 8118.6,3715.2 8118.4,3716.6 8118.1,3718.1 8118.1,3720.1 8118.1,3722.2 8118.3,3723.4 8118.5,3724.7 8118.9,3726.2 8119.3,3727.7 8119.7,3728.7 8120.2,3729.7 8121.1,3730.8 8121.9,3731.9 8122.9,3732.7 8123.8,3733.5 8124.8,3733.9 8125.8,3734.4 8127,3734.7 8128.2,3735 8130,3735 8131.8,3735 8132.9,3734.8 8134,3734.5 8135.5,3733.8 8137,3733.1 8138.5,3731.6 8139.9,3730.1 8140.5,3728.9 8141.1,3727.7 8141.5,3726.6 8141.8,3725.5 8141.9,3721.7 8142,3718 8133,3718 8124.1,3718 8124.1,3717.5 8124.1,3717 8124.3,3716 8124.6,3715.1 8125,3714.3 8125.4,3713.5 8126.1,3712.8 8126.8,3712.2 8127.7,3711.8 8128.5,3711.4 8129.6,3711.3 8130.7,3711.1 8131.8,3711.2 8132.9,3711.4 8133.6,3711.7 8134.3,3711.9 8135.1,3712.4 8135.9,3712.9 8136.5,3713.4 8137.2,3713.9 8139.3,3712.1 8141.5,3710.3 8140.8,3709.5 8140.1,3708.8 8139.1,3708.1 8138.1,3707.4 8136.9,3706.9 8135.8,3706.3 hole: 81240702.8,37234403.8 81240702.8,37229917.7 81240702.8,37229917.7 81300215.4,37229917.7 81300215.4,37229917.7 81359726.3,37229917.7 81359726.3,37229917.7 81359726.3,37234403.8 81359726.3,37234403.8 81359726.3,37238888.1 81359726.3,37238888.1 81357322.1,37248116.9 81357322.1,37248116.9 81354917.8,37257345.6 81354917.8,37257345.6 81351578.2,37263886.4 81351578.2,37263886.4 81348238.6,37270428.8 81348238.6,37270428.8 81341582.8,37277646.1 81341582.8,37277646.1 81334925.3,37284865.2 81334925.3,37284865.2 81326818.8,37289051.2 81326818.8,37289051.2 81318712.4,37293239 81318712.4,37293239 81302628,37293782.3 81302628,37293782.3 81286543.6,37294325.5 81286543.6,37294325.5 81277460.1,37290502.7 81277460.1,37290502.7 81268376.7,37286678.2 81268376.7,37286678.2 81264306.8,37283478.7 81264306.8,37283478.7 81260238.6,37280279.1 81260238.6,37280279.1 81256320.4,37275596.4 81256320.4,37275596.4 81252400.6,37270912.1 81252400.6,37270912.1 81248956,37264128 81248956,37264128 81245511.3,37257345.6 81245511.3,37257345.6 81243107.1,37248116.9 81243107.1,37248116.9 81240702.8,37238888.1 81240702.8,37238888.1 81240702.8,37234403.8
  region: 8010.3,3705.6 8009.2,3705.9 8008.2,3706.1 8007.3,3706.6 8006.4,3707 8005.5,3707.8 8004.6,3708.5 8003.8,3709.7 8003,3710.9 8002.7,3711.7 8002.5,3712.5 8002.3,3713.7 8002.1,3715 8002.1,3720.4 8002.1,3725.8 8002.4,3727.3 8002.6,3728.9 8003.1,3729.9 8003.6,3730.9 8005,3732.2 8006.3,3733.6 8007.3,3734.1 8008.3,3734.6 8009.4,3734.8 8010.4,3735.1 8012.2,3735 8014,3734.9 8015,3734.5 8016,3734.1 8016.9,3733.6 8017.8,3733 8018.5,3732.4 8019.2,3731.8 8019.2,3739.1 8019.2,3746.3 8022.2,3746.3 8025.2,3746.3 8025.2,3726.1 8025.2,3706 8022.2,3706 8019.2,3706 8019.2,3707.3 8019.2,3708.7 8018.6,3708.2 8018,3707.6 8017,3707 8016,3706.4 8015.1,3706.1 8014.1,3705.7 8012.2,3705.7 hole: 80134991.5,37115395.1 80147956.4,37115315.2 80147956.4,37115315.2 80156654.7,37118203.1 80156654.7,37118203.1 80165353,37121091 80165353,37121091 80173512.8,37129286.6 80173512.8,37129286.6 80181672.5,37137480.4 80181672.5,37137480.4 80185270.6,37148503.9 80185270.6,37148503.9 80188870.3,37159527.4 80188870.3,37159527.4 80190629.3,37176636.7 80190629.3,37176636.7 80192388.3,37193746 80192388.3,37193746 80191431.2,37215573 80191431.2,37215573 80190472.5,37237400 80190472.5,37237400 80188651.9,37246117.2 80188651.9,37246117.2 80186832.8,37254836 80186832.8,37254836 80182152.7,37264759.6 80182152.7,37264759.6 80177472.6,37274684.9 80177472.6,37274684.9 80172455.7,37278904.3 80172455.7,37278904.3 80167438.8,37283123.7 80167438.8,37283123.7 80160818,37286576.6 80160818,37286576.6 80154197.1,37290029.4 80154197.1,37290029.4 80138112.7,37290492.7 80138112.7,37290492.7 80122028.2,37290957.6 80122028.2,37290957.6 80114643.8,37288596.3 80114643.8,37288596.3 80107261,37286236.6 80107261,37286236.6 80099699.8,37279584.2 80099699.8,37279584.2 80092138.6,37272931.8 80092138.6,37272931.8 80089110.7,37267002.6 80089110.7,37267002.6 80086084.6,37261073.4 80086084.6,37261073.4 80083195.2,37250719.9 80083195.2,37250719.9 80080305.7,37240367.9 80080305.7,37240367.9 80080305.7,37203393 80080305.7,37203393 80080305.7,37166416.5 80080305.7,37166416.5 80083195.2,37156064.5 80083195.2,37156064.5 80086084.6,37145711 80086084.6,37145711 80089165.8,37139676.8 80089165.8,37139676.8 80092245.3,37133642.6 80092245.3,37133642.6 80098095.8,37127963.4 80098095.8,37127963.4 80103946.4,37122284.2 80103946.4,37122284.2 80112988.1,37118879.7 80112988.1,37118879.7 80122028.2,37115475.1 80122028.2,37115475.1 80134991.5,37115395.1
  region: 7961.2,3705.6 7959.9,3705.9 7958.7,3706.3 7957.4,3706.9 7956.1,3707.6 7955.3,3708.6 7954.4,3709.6 7954,3710.4 7953.6,3711.2 7953.3,3712.1 7953.1,3713.1 7953.1,3714.4 7953.1,3715.8 7953.3,3716.8 7953.6,3717.7 7954,3718.5 7954.4,3719.3 7955.3,3720.2 7956.2,3721.2 7957.5,3721.9 7958.8,3722.5 7960.1,3722.8 7961.3,3723 7965.9,3723 7970.5,3723 7970.4,3724.9 7970.4,3726.8 7970.1,3727.3 7969.9,3727.9 7969.4,3728.4 7968.9,3728.8 7967.9,3729.1 7966.9,3729.4 7964.8,3729.4 7962.8,3729.4 7962,3729.3 7961.3,3729.1 7960.9,3728.9 7960.6,3728.7 7959.8,3728 7959.1,3727.3 7956.8,3729 7954.5,3730.7 7954.5,3730.9 7954.5,3731.1 7955.6,3732.1 7956.7,3733.2 7957.7,3733.7 7958.6,3734.2 7959.6,3734.5 7960.5,3734.8 7961.3,3734.9 7962,3735 7965,3735 7968,3734.9 7969.3,3734.6 7970.7,3734.2 7971.7,3733.7 7972.8,3733.2 7973.9,3732.2 7974.9,3731.2 7975.3,3730.3 7975.8,3729.3 7976,3728.4 7976.3,3727.4 7976.3,3716.7 7976.3,3706 7973.4,3706 7970.5,3706 7970.5,3707.2 7970.5,3708.4 7969.8,3707.6 7969.1,3706.9 7968.4,3706.5 7967.6,3706.1 7966.6,3705.9 7965.7,3705.6 7963.4,3705.6 hole: 79614954.1,37114830.2 79625019.6,37111759 79625019.6,37111759 79646732.8,37111894 79646732.8,37111894 79668447.7,37112028.9 79668447.7,37112028.9 79677687.9,37114750.2 79677687.9,37114750.2 79686929.8,37117471.5 79686929.8,37117471.5 79692548.6,37122402.5 79692548.6,37122402.5 79698169,37127333.5 79698169,37127333.5 79700656.6,37135622.4 79700656.6,37135622.4 79703144.3,37143911.2 79703144.3,37143911.2 79704136.3,37161997.1 79704136.3,37161997.1 79705128.3,37180081.2 79705128.3,37180081.2 79662660.6,37179996.3 79662660.6,37179996.3 79620192.8,37179909.6 79620192.8,37179909.6 79610749.2,37176893.3 79610749.2,37176893.3 79601305.6,37173878.8 79601305.6,37173878.8 79596477.1,37169344.4 79596477.1,37169344.4 79591650.3,37164810 79591650.3,37164810 79589434.4,37159637.4 79589434.4,37159637.4 79587220.3,37154463.1 79587220.3,37154463.1 79587220.3,37146294.2 79587220.3,37146294.2 79587220.3,37138123.7 79587220.3,37138123.7 79589591.2,37133542.6 79589591.2,37133542.6 79591962.1,37128961.6 79591962.1,37128961.6 79598424.5,37123430.7 79598424.5,37123430.7 79604888.6,37117901.5 79604888.6,37117901.5 79614954.1,37114830.2
  region: 8082.8,3705.9 8081.8,3705.6 8079.6,3705.6 8077.3,3705.6 8076.1,3705.9 8074.9,3706.2 8073.8,3706.8 8072.7,3707.3 8071.6,3708.4 8070.6,3709.4 8070.1,3710.3 8069.7,3711.2 8069.5,3712.1 8069.2,3712.9 8069.2,3714.4 8069.2,3715.9 8069.5,3716.8 8069.7,3717.7 8070.2,3718.7 8070.7,3719.6 8071.6,3720.5 8072.6,3721.4 8073.8,3722 8074.9,3722.5 8076.2,3722.8 8077.5,3723 8081.9,3723 8086.4,3723 8086.4,3724.9 8086.4,3726.8 8086.3,3727.3 8086.1,3727.7 8085.6,3728.3 8085.1,3728.8 8084.3,3729 8083.5,3729.3 8082.1,3729.4 8080.7,3729.5 8079.3,3729.4 8077.9,3729.3 8077.2,3729 8076.5,3728.7 8075.9,3728 8075.2,3727.3 8073,3729 8070.8,3730.7 8070.7,3730.8 8070.6,3731 8071.5,3732 8072.4,3732.9 8073.4,3733.5 8074.4,3734.1 8075.5,3734.4 8076.6,3734.7 8077.4,3734.9 8078.1,3735 8081.1,3735 8084.1,3734.9 8085.5,3734.6 8086.8,3734.2 8087.8,3733.7 8088.9,3733.3 8089.9,3732.3 8090.9,3731.4 8091.3,3730.6 8091.7,3729.8 8092.1,3728.6 8092.4,3727.4 8092.4,3716.7 8092.4,3706 8089.4,3706 8086.4,3706 8086.4,3707.1 8086.4,3708.2 8085.8,3707.5 8085.2,3706.9 8084.5,3706.5 8083.8,3706.1 hole: 80774144.1,37115436.8 80784708.1,37111814 80784708.1,37111814 80807226.6,37111905.6 80807226.6,37111905.6 80829745.2,37111997.3 80829745.2,37111997.3 80838985.4,37114733.6 80838985.4,37114733.6 80848227.2,37117471.5 80848227.2,37117471.5 80853846,37122402.5 80853846,37122402.5 80859466.5,37127333.5 80859466.5,37127333.5 80861895.7,37135512.4 80861895.7,37135512.4 80864326.6,37143691.3 80864326.6,37143691.3 80864326.6,37161885.4 80864326.6,37161885.4 80864326.6,37180081.2 80864326.6,37180081.2 80822909.3,37179896.3 80822909.3,37179896.3 80781490.2,37179709.6 80781490.2,37179709.6 80778274,37178994.7 80778274,37178994.7 80775057.8,37178281.5 80775057.8,37178281.5 80768623.7,37175841.8 80768623.7,37175841.8 80762189.5,37173403.8 80762189.5,37173403.8 80757622.8,37169106.1 80757622.8,37169106.1 80753056.1,37164810 80753056.1,37164810 80750556.8,37160024 80750556.8,37160024 80748059.2,37155239.7 80748059.2,37155239.7 80748059.2,37147085.8 80748059.2,37147085.8 80748059.2,37138930.2 80748059.2,37138930.2 80750086.6,37134990.8 80750086.6,37134990.8 80752115.7,37131049.7 80752115.7,37131049.7 80757847.9,37125053.8 80757847.9,37125053.8 80763581.7,37119059.6 80763581.7,37119059.6 80774144.1,37115436.8
  region: 8042.7,3706.7 8042.5,3705.9 8039.8,3706 8037.2,3706 8032.7,3720 8028.2,3734 8028.1,3734.4 8028,3734.7 8031.2,3734.7 8034.3,3734.7 8034.5,3734 8034.8,3733.2 8037.2,3724.1 8039.7,3715 8039.8,3715 8039.9,3715 8043.1,3724.8 8046.3,3734.7 8048.5,3734.7 8050.6,3734.7 8053.9,3724.8 8057.1,3714.8 8057.1,3714.9 8057.2,3714.9 8059.9,3724.8 8062.6,3734.6 8065.8,3734.7 8068.9,3734.7 8068.9,3734.5 8068.8,3734.3 8064.7,3721.6 8060.7,3708.9 8060.2,3707.4 8059.7,3706 8057.1,3706 8054.4,3706 8054,3707.5 8053.5,3709.1 8051,3717.3 8048.6,3725.5 8048.5,3725.6 8048.4,3725.7 8045.7,3716.6 8042.9,3707.5
  region: 99 vertices and 1 holes, not listed, extent 7926.1,3706 7949.2,3780.4
  region: 7988.5,3715.2 7988.5,3706 7985.5,3706 7982.5,3706 7982.5,3720.3 7982.5,3734.7 7985.5,3734.7 7988.5,3734.7 7988.5,3733.3 7988.5,3731.8 7989.3,3732.6 7990.2,3733.5 7991.3,3734 7992.4,3734.6 7993.3,3734.8 7994.2,3735 7995.9,3735 7997.6,3735 7998.9,3734.6 8000.1,3734.1 8001.1,3733.5 8002,3732.9 8001.9,3732.7 8001.8,3732.5 7999.9,3730.1 7997.9,3727.8 7997.8,3727.8 7997.7,3727.8 7996.8,3728.4 7995.8,3728.9 7995.1,3729 7994.4,3729.1 7993.3,3729.1 7992.3,3729 7991.4,3728.6 7990.6,3728.2 7989.9,3727.3 7989.1,3726.5 7988.8,3725.5 7988.5,3724.4
  region: 8104.6,3715.2 8104.6,3706 8101.6,3706 8098.7,3706 8098.7,3720.3 8098.7,3734.7 8101.6,3734.7 8104.6,3734.7 8104.6,3733.3 8104.6,3731.9 8105.4,3732.7 8106.3,3733.4 8107.2,3733.9 8108.2,3734.4 8109.2,3734.7 8110.2,3735 8111.9,3735 8113.6,3735 8114.4,3734.8 8115.3,3734.5 8116.3,3734 8117.2,3733.6 8117.7,3733.2 8118.1,3732.9 8118.1,3732.8 8118.1,3732.7 8116.1,3730.3 8114.1,3727.9 8113.9,3727.8 8113.8,3727.8 8113,3728.3 8112.2,3728.7 8111.6,3728.9 8111,3729.1 8109.7,3729.1 8108.4,3729 8107.6,3728.6 8106.8,3728.2 8106.4,3727.8 8106.1,3727.5 8105.6,3726.9 8105.2,3726.4 8104.9,3725.4 8104.6,3724.4
  region: 8084.8,3751 8083.8,3751.2 8082.8,3751.5 8081.7,3752 8080.6,3752.6 8079.6,3753.5 8078.7,3754.4 8078,3755.4 8077.4,3756.3 8077,3757.6 8076.5,3758.9 8076.5,3769.5 8076.4,3780.1 8079.4,3780.1 8082.4,3780.1 8082.4,3770.7 8082.5,3761.3 8082.9,3760.4 8083.2,3759.5 8083.8,3758.8 8084.3,3758.1 8085.3,3757.6 8086.4,3757 8087.7,3756.9 8089.1,3756.9 8089.9,3757.1 8090.8,3757.4 8091.4,3757.9 8092.1,3758.4 8092.6,3759.2 8093.2,3760 8093.4,3761 8093.7,3762 8093.7,3771 8093.7,3780.1 8096.6,3780.1 8099.6,3780.1 8099.6,3765.7 8099.6,3751.3 8096.6,3751.3 8093.7,3751.3 8093.7,3752.7 8093.7,3754.2 8092.8,3753.4 8092,3752.6 8090.9,3752 8089.9,3751.5 8088.9,3751.2 8087.9,3751 8086.4,3751
  region: 59 vertices and 1 holes, not listed, extent 8047.8,3751 8071.8,3780.4
  region: 8139.5,3751 8137.4,3751 8135.4,3751 8134.1,3751.3 8132.8,3751.6 8131.3,3752.4 8129.8,3753.1 8128.5,3754.4 8127.2,3755.7 8126.7,3756.6 8126.1,3757.5 8125.7,3758.5 8125.3,3759.5 8125,3760.7 8124.7,3762 8124.5,3763.8 8124.4,3765.6 8124.6,3767.4 8124.7,3769.2 8125.1,3770.8 8125.5,3772.4 8126.1,3773.7 8126.8,3775 8127.7,3776.1 8128.6,3777.2 8129.6,3777.9 8130.6,3778.7 8131.7,3779.2 8132.9,3779.7 8134.2,3780.1 8135.4,3780.4 8137.3,3780.4 8139.3,3780.4 8140.3,3780.2 8141.4,3779.9 8142.4,3779.5 8143.4,3779.1 8144.3,3778.6 8145.2,3778.1 8146.4,3777 8147.6,3776 8147.8,3775.6 8148,3775.3 8146.6,3774 8145.1,3772.7 8144.4,3772.1 8143.7,3771.5 8142.9,3772.2 8142.1,3772.9 8141.5,3773.4 8140.9,3773.8 8139.9,3774.1 8139,3774.5 8137.3,3774.4 8135.6,3774.3 8134.4,3773.8 8133.2,3773.3 8132.5,3772.5 8131.8,3771.7 8131.4,3770.8 8131,3770 8130.7,3768.8 8130.5,3767.6 8130.5,3765.5 8130.5,3763.4 8130.8,3762.2 8131.1,3760.9 8131.6,3760.2 8132,3759.4 8132.3,3759 8132.7,3758.6 8133.4,3758.1 8134.1,3757.6 8135.1,3757.2 8136.2,3756.9 8137.7,3756.9 8139.1,3756.9 8140,3757.2 8140.9,3757.6 8141.6,3758.1 8142.3,3758.6 8143,3759.2 8143.7,3759.9 8145.1,3758.6 8146.5,3757.3 8147.3,3756.6 8148.1,3755.9 8147.5,3755.3 8147,3754.8 8145.8,3753.8 8144.7,3752.9 8143.3,3752.3 8142,3751.6 8140.7,3751.3
  region: 7969.7,3751.4 7968.5,3751 7965.6,3751 7962.8,3751 7961.8,3751.3 7960.7,3751.6 7959.4,3752.3 7958,3752.9 7956.7,3754.2 7955.4,3755.5 7954.7,3756.8 7954.1,3758.1 7953.8,3759.2 7953.4,3760.4 7953.2,3761.9 7952.9,3763.4 7953,3766.3 7953.1,3769.2 7953.3,3770.3 7953.6,3771.3 7954,3772.6 7954.3,3773.8 7955,3775 7955.7,3776.1 7956.9,3777.3 7958.2,3778.6 7959.4,3779.2 7960.6,3779.8 7961.7,3780.1 7962.8,3780.4 7964.7,3780.4 7966.6,3780.4 7967.7,3780.1 7968.8,3779.9 7970.2,3779.2 7971.7,3778.5 7972.9,3777.4 7974.1,3776.3 7974.8,3775.1 7975.6,3774 7976,3772.7 7976.4,3771.5 7976.6,3770.5 7976.7,3769.6 7976.7,3766.4 7976.7,3763.3 7967.8,3763.3 7958.9,3763.3 7958.9,3762.8 7958.9,3762.2 7959.1,3761.2 7959.4,3760.2 7959.6,3759.7 7959.9,3759.3 7960.7,3758.4 7961.5,3757.6 7962.4,3757.2 7963.3,3756.8 7964.4,3756.6 7965.6,3756.4 7966.7,3756.6 7967.8,3756.8 7969.1,3757.4 7970.4,3758 7971.2,3758.7 7971.9,3759.3 7974,3757.5 7976.1,3755.7 7976.1,3755.5 7976,3755.2 7974.8,3754.2 7973.5,3753.1 7972.3,3752.4 7971,3751.8 hole: 79707854.4,37683265.3 79707829.4,37686881.5 79707829.4,37686881.5 79707806,37690499.3 79707806,37690499.3 79705423.4,37700597.9 79705423.4,37700597.9 79703042.5,37710694.9 79703042.5,37710694.9 79699704.6,37717235.6 79699704.6,37717235.6 79696366.7,37723774.7 79696366.7,37723774.7 79690107.6,37730560.5 79690107.6,37730560.5 79683850.3,37737346.2 79683850.3,37737346.2 79676057.3,37741585.6 79676057.3,37741585.6 79668264.3,37745825 79668264.3,37745825 79661116.6,37746798.2 79661116.6,37746798.2 79653970.6,37747771.4 79653970.6,37747771.4 79650754.4,37748238 79650754.4,37748238 79647536.5,37748704.6 79647536.5,37748704.6 79638199.6,37747379.8 79638199.6,37747379.8 79628861.1,37746055 79628861.1,37746055 79619022.3,37740814.1 79619022.3,37740814.1 79609185.3,37735573.1 79609185.3,37735573.1 79602239.3,37726144.4 79602239.3,37726144.4 79595295,37716715.7 79595295,37716715.7 79592769,37708430.2 79592769,37708430.2 79590243.1,37700144.7 79590243.1,37700144.7 79589311,37691704.2 79589311,37691704.2 79588379,37683265.3 79588379,37683265.3 79648116.7,37683265.3 79648116.7,37683265.3 79707854.4,37683265.3
  region: 8166.1,3751.4 8164.8,3751 8162,3751 8159.2,3751 8157.9,3751.4 8156.7,3751.8 8155.5,3752.4 8154.4,3753 8153.3,3754 8152.2,3755 8151.5,3756.2 8150.8,3757.3 8150.3,3758.8 8149.8,3760.2 8149.6,3761.7 8149.3,3763.3 8149.3,3765.6 8149.3,3767.9 8149.6,3769.5 8149.8,3771 8150.3,3772.4 8150.8,3773.9 8151.4,3774.9 8152,3776 8153.3,3777.3 8154.6,3778.6 8155.8,3779.2 8157,3779.8 8158.1,3780.1 8159.2,3780.4 8161.1,3780.4 8163,3780.4 8164.1,3780.1 8165.2,3779.9 8166.6,3779.2 8168.1,3778.5 8169.2,3777.4 8170.4,3776.3 8171.2,3775.2 8171.9,3774 8172.4,3772.7 8172.8,3771.4 8173,3770.4 8173.1,3769.4 8173.1,3766.4 8173.1,3763.3 8164.2,3763.3 8155.2,3763.3 8155.3,3762.3 8155.4,3761.3 8155.8,3760.4 8156.1,3759.5 8157,3758.5 8157.8,3757.6 8158.8,3757.2 8159.7,3756.8 8160.8,3756.6 8161.9,3756.4 8163.1,3756.6 8164.2,3756.8 8165.6,3757.4 8166.9,3758.1 8167.6,3758.7 8168.3,3759.3 8170.4,3757.5 8172.5,3755.8 8172.5,3755.6 8172.5,3755.4 8171.9,3754.8 8171.3,3754.2 8170.4,3753.5 8169.5,3752.9 8168.4,3752.3 8167.4,3751.8 hole: 81671764.8,37683265.3 81671764.8,37686946.5 81671764.8,37686946.5 81671764.8,37690627.6 81671764.8,37690627.6 81669303.8,37700209.7 81669303.8,37700209.7 81666842.9,37709790 81666842.9,37709790 81662836.4,37718055.5 81662836.4,37718055.5 81658831.5,37726321.1 81658831.5,37726321.1 81651507.1,37733070.1 81651507.1,37733070.1 81644182.6,37739817.5 81644182.6,37739817.5 81636756.5,37743102.1 81636756.5,37743102.1 81629328.7,37746385 81629328.7,37746385 81620388.6,37747413.2 81620388.6,37747413.2 81611448.5,37748439.7 81611448.5,37748439.7 81602110,37747248.2 81602110,37747248.2 81592773.1,37746055 81592773.1,37746055 81583016.1,37740857.4 81583016.1,37740857.4 81573259.1,37735659.8 81573259.1,37735659.8 81566905,37727249.3 81566905,37727249.3 81560552.6,37718838.8 81560552.6,37718838.8 81557414.7,37710584.9 81557414.7,37710584.9 81554275.2,37702329.4 81554275.2,37702329.4 81553279.8,37692797.3 81553279.8,37692797.3 81552282.8,37683265.3 81552282.8,37683265.3 81612023.8,37683265.3 81612023.8,37683265.3 81671764.8,37683265.3
  region: 7906.7,3751 7905.7,3751.3 7904.8,3751.6 7904,3752 7903.2,3752.4 7902.2,3753.2 7901.2,3753.9 7900.3,3754.9 7899.4,3756 7898.8,3757.2 7898.2,3758.3 7897.9,3759.9 7897.5,3761.5 7897.5,3765.7 7897.5,3769.9 7897.9,3771.4 7898.2,3773 7898.7,3774 7899.2,3775 7900.1,3776.2 7901.1,3777.5 7902.2,3778.2 7903.2,3778.9 7904.1,3779.3 7905,3779.7 7906.1,3780.1 7907.3,3780.4 7909.7,3780.3 7912.2,3780.3 7913.3,3779.9 7914.4,3779.5 7915.5,3778.9 7916.7,3778.2 7917.7,3777.2 7918.8,3776.1 7919.4,3775.2 7919.9,3774.3 7920.3,3773.5 7920.6,3772.7 7920.9,3771.4 7921.2,3770 7921.2,3765.7 7921.2,3761.3 7920.9,3760 7920.6,3758.7 7920.3,3757.9 7920,3757.1 7919.4,3756.1 7918.8,3755.2 7917.7,3754.2 7916.7,3753.1 7915.6,3752.5 7914.6,3751.9 7913.4,3751.5 7912.2,3751.1 7909.4,3751 hole: 79072273.1,37572262.3 79081364.9,37568854.4 79081364.9,37568854.4 79095840.4,37569409.3 79095840.4,37569409.3 79110315.9,37569964.2 79110315.9,37569964.2 79119236,37574127 79119236,37574127 79128156,37578291.4 79128156,37578291.4 79134081.6,37583490.7 79134081.6,37583490.7 79140007.2,37588691.7 79140007.2,37588691.7 79144820.7,37598600.3 79144820.7,37598600.3 79149634.2,37608510.6 79149634.2,37608510.6 79151274.8,37618960.8 79151274.8,37618960.8 79152915.4,37629409.4 79152915.4,37629409.4 79152915.4,37656739 79152915.4,37656739 79152915.4,37684068.5 79152915.4,37684068.5 79151274.8,37694518.8 79151274.8,37694518.8 79149634.2,37704967.3 79149634.2,37704967.3 79144820.7,37714877.6 79144820.7,37714877.6 79140007.2,37724787.9 79140007.2,37724787.9 79134081.6,37729987.2 79134081.6,37729987.2 79128156,37735188.2 79128156,37735188.2 79119236,37739350.9 79119236,37739350.9 79110315.9,37743515.4 79110315.9,37743515.4 79095840.4,37743897 79095840.4,37743897 79081364.9,37744276.9 79081364.9,37744276.9 79074075.5,37741958.9 79074075.5,37741958.9 79066787.7,37739639.2 79066787.7,37739639.2 79057991.1,37733513.4 79057991.1,37733513.4 79049196,37727387.6 79049196,37727387.6 79043200.4,37715374.2 79043200.4,37715374.2 79037204.8,37703360.9 79037204.8,37703360.9 79035559.2,37690784.3 79035559.2,37690784.3 79033915.2,37678209.3 79033915.2,37678209.3 79033915.2,37656739 79033915.2,37656739 79033915.2,37635268.6 79033915.2,37635268.6 79035580.9,37622693.7 79035580.9,37622693.7 79037246.5,37610118.7 79037246.5,37610118.7 79042902,37598473.7 79042902,37598473.7 79048555.8,37586828.6 79048555.8,37586828.6 79055868.6,37581249.4 79055868.6,37581249.4 79063181.4,37575668.5 79063181.4,37575668.5 79072273.1,37572262.3
  region: 8032.9,3751.1 8029.7,3751 8028.1,3751.5 8026.5,3751.9 8024.9,3752.7 8023.3,3753.5 8022,3754.5 8020.7,3755.4 8020.4,3755.8 8020,3756.2 8022.1,3758.2 8024.2,3760.1 8025.4,3759.2 8026.6,3758.2 8027.8,3757.7 8028.9,3757.1 8030.1,3756.9 8031.2,3756.6 8032.3,3756.5 8033.4,3756.4 8034.6,3756.6 8035.8,3756.8 8036.6,3757.1 8037.4,3757.4 8038,3758.1 8038.6,3758.8 8038.8,3759.4 8038.9,3760 8038.8,3760.6 8038.7,3761.2 8038.4,3761.6 8038.1,3762 8037.4,3762.3 8036.7,3762.7 8033.1,3763 8029.6,3763.3 8028.5,3763.6 8027.4,3763.8 8026.3,3764.3 8025.2,3764.9 8024.3,3765.7 8023.4,3766.5 8022.9,3767.5 8022.4,3768.4 8022.2,3769.5 8021.9,3770.7 8022,3772.1 8022.1,3773.6 8022.4,3774.5 8022.7,3775.5 8023.1,3776.1 8023.5,3776.8 8024.5,3777.7 8025.4,3778.6 8026.1,3778.9 8026.7,3779.3 8027.6,3779.6 8028.5,3779.9 8029.5,3780.1 8030.5,3780.4 8033.4,3780.3 8036.2,3780.3 8037.5,3779.9 8038.9,3779.6 8040.5,3778.8 8042.1,3778 8043.1,3777.3 8044.2,3776.5 8043.9,3776.2 8043.7,3776 8042.3,3774.3 8040.9,3772.6 8040.7,3772.4 8040.5,3772.1 8040,3772.5 8039.5,3772.8 8038.2,3773.4 8036.9,3774.1 8035.7,3774.4 8034.6,3774.8 8032.9,3774.8 8031.3,3774.8 8030.4,3774.5 8029.4,3774.2 8028.7,3773.6 8028.1,3772.9 8028,3772.1 8027.8,3771.4 8027.9,3771 8028.1,3770.6 8028.5,3770 8029,3769.5 8029.8,3769.2 8030.5,3768.9 8034.3,3768.6 8038.1,3768.3 8039,3768.1 8039.9,3767.8 8040.8,3767.3 8041.8,3766.8 8042.5,3766 8043.3,3765.3 8043.8,3764.3 8044.3,3763.3 8044.5,3762.1 8044.8,3761 8044.8,3759.9 8044.8,3758.7 8044.5,3757.8 8044.3,3756.9 8043.8,3755.9 8043.3,3755 8042.2,3754 8041.2,3753 8039.8,3752.4 8038.5,3751.8 8037.3,3751.4 8036,3751.1
  region: 7981.6,3751.3 7981.6,3765.7 7981.6,3780.1 7984.5,3780.1 7987.5,3780.1 7987.5,3778.7 7987.5,3777.3 7988.4,3778.1 7989.4,3778.9 7990.2,3779.3 7991.1,3779.8 7992.1,3780.1 7993.1,3780.4 7994.8,3780.4 7996.4,3780.4 7997.3,3780.1 7998.2,3779.9 7999.4,3779.3 8000.6,3778.7 8001.7,3777.6 8002.9,3776.4 8003.4,3775.5 8003.9,3774.5 8004.2,3773.2 8004.6,3772 8004.6,3761.6 8004.6,3751.3 8001.6,3751.3 7998.6,3751.3 7998.6,3760.8 7998.5,3770.3 7998.1,3771.2 7997.7,3772.1 7997.1,3772.8 7996.5,3773.4 7995.7,3773.9 7994.8,3774.3 7993.4,3774.4 7991.9,3774.5 7991,3774.1 7990.1,3773.8 7989.4,3773.1 7988.7,3772.5 7988.1,3771.4 7987.6,3770.3 7987.5,3760.8 7987.5,3751.3 7984.5,3751.3
  region: 8111.7,3760.7 8111.7,3751.3 8108.7,3751.3 8105.7,3751.3 8105.7,3765.7 8105.7,3780.1 8108.7,3780.1 8111.7,3780.1 8111.7,3778.6 8111.7,3777.1 8112.5,3777.9 8113.4,3778.7 8114.2,3779.2 8114.9,3779.6 8116.1,3780 8117.2,3780.4 8119,3780.4 8120.8,3780.4 8121.7,3780.1 8122.5,3779.9 8123.6,3779.3 8124.6,3778.8 8125,3778.5 8125.4,3778.2 8123.3,3775.7 8121.2,3773.1 8121.1,3773.1 8119.8,3773.8 8118.6,3774.4 8117.3,3774.4 8116,3774.4 8115.1,3774.1 8114.2,3773.7 8113.4,3772.9 8112.5,3772.1 8112.2,3771.1 8111.8,3770.2
  region: 259 vertices and 0 holes, not listed, extent 7928.2,3802.2 8142.4,3995

## Silkscreen, mask and mechanical layers (free items; w line width, h text height)
Top Silkscreen Layer:
  text "sd - net 1.5" at 6397.5,3770 h120